# Altium PCB Temp_module2.PcbDoc
Units mm, origin at the board's own origin, x right, y up, seen from the top; angles counter-clockwise.
Board outline 266.06 x 102.49 mm, 2 copper layers (Top Layer, Bottom Layer); 102 components, 47 nets, 448 pads, 151 vias.
Unrouted connection lines stored in the file: 10.
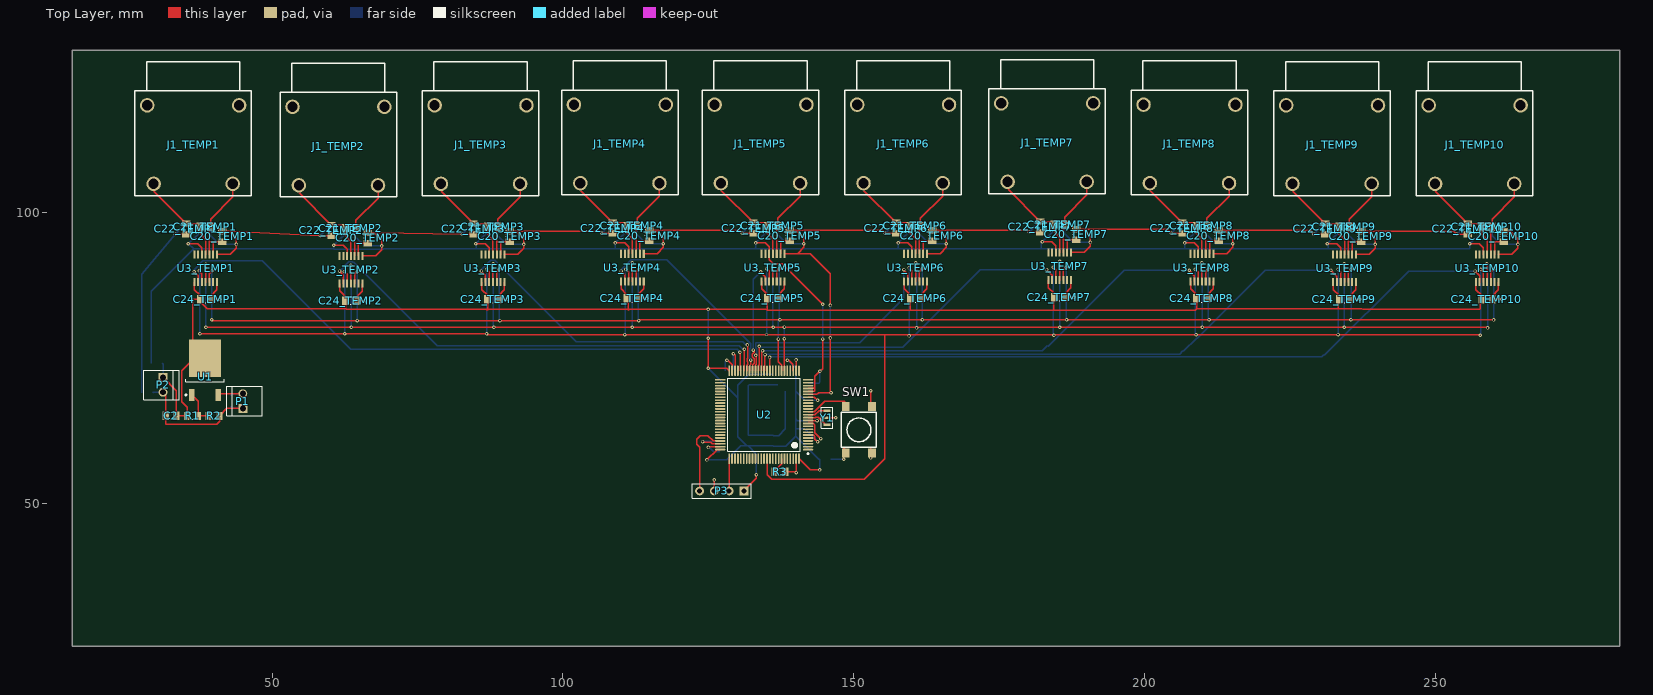
[diagram p0: Top Layer view]
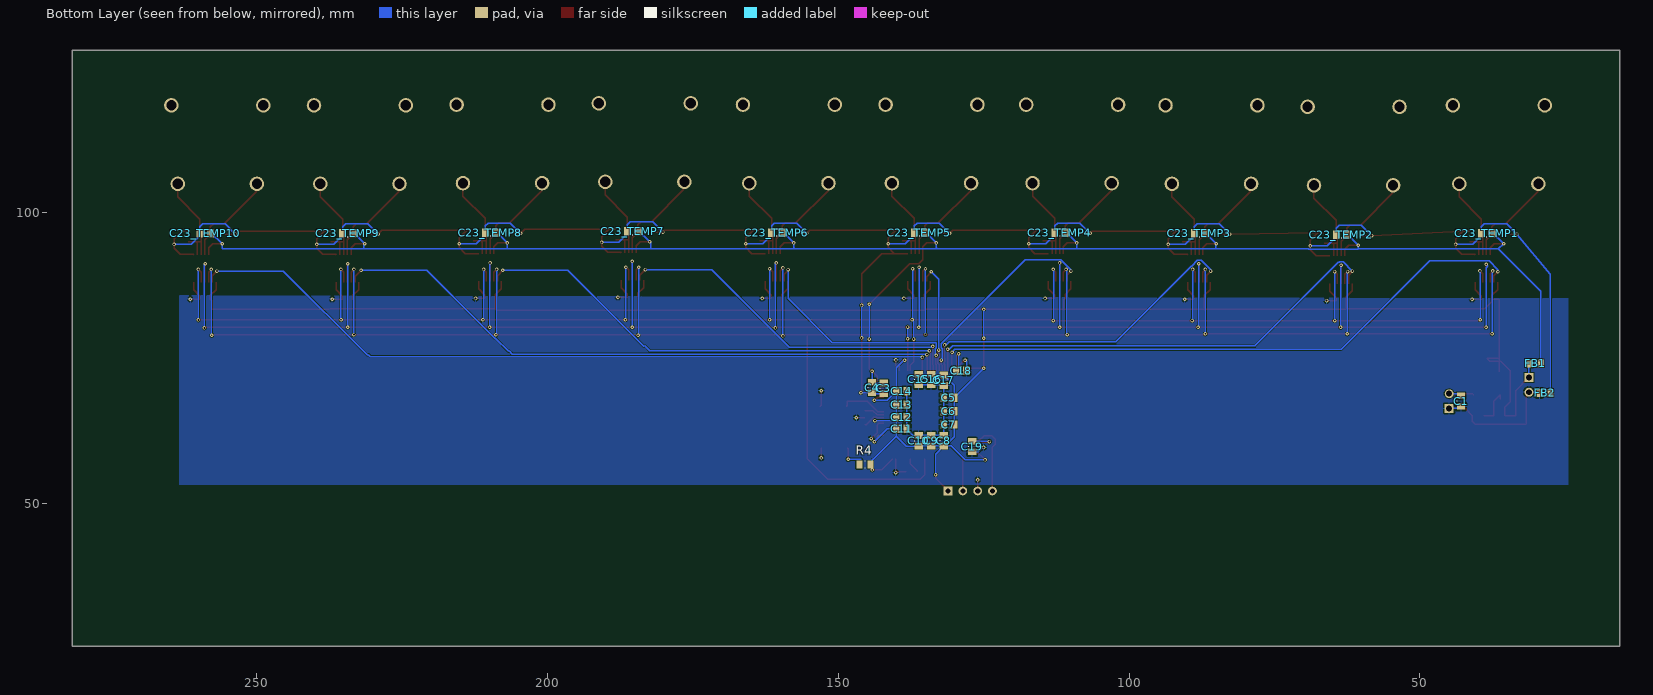
[diagram p1: Bottom Layer view, seen from below]
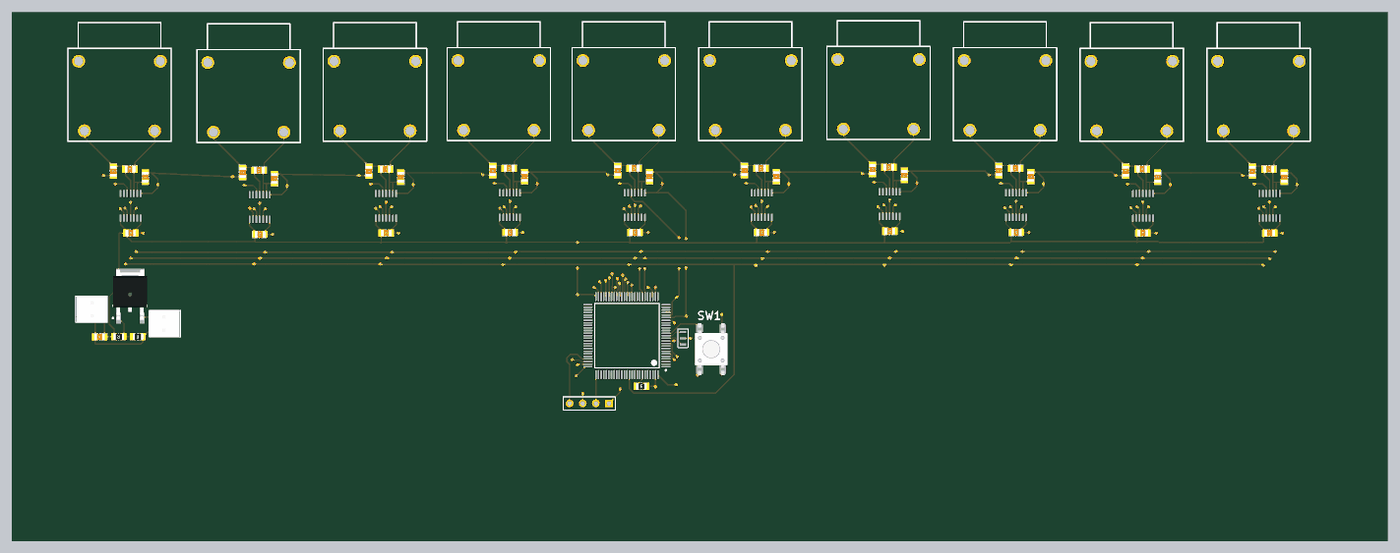
[diagram p2: 3D render of the assembled board from above, using the file's embedded part models]
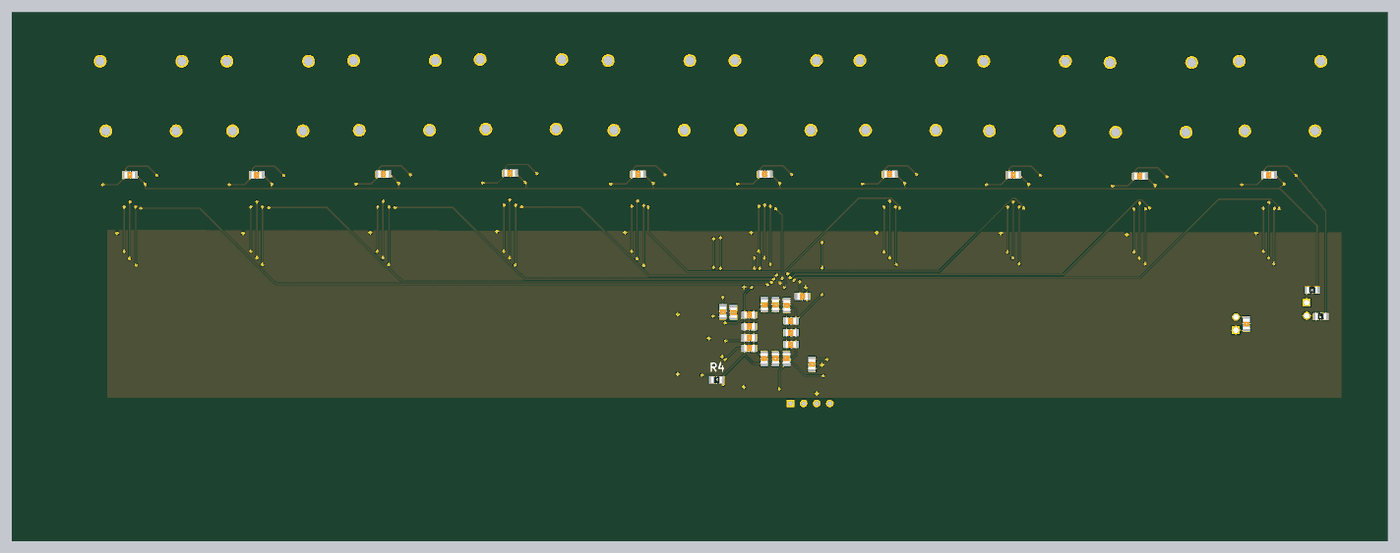
[diagram p3: 3D render of the assembled board from below, using the file's embedded part models]

## Layer stack, top to bottom
Top Solder: solder mask 0.0102, Solder Resist, Dk 3.5
Top Layer: signal copper 0.0356
Dielectric 1: dielectric 0.32, FR-4, Dk 4.8
Bottom Layer: signal copper 0.0356
Bottom Solder: solder mask 0.0102, Solder Resist, Dk 3.5

## Board outline
15.621,25.4 281.686,25.4 281.686,127.889 15.621,127.889

## Design rules (kind name [scope] priority, off if disabled: settings)
Clearance [All] p1: gap=0.152 ignorepadtopadclearanceinfootprint=FALSE
PolygonConnect [All] p1: connectstyle=Relief reliefconductorwidth=0.254 reliefentries=4 polygonreliefangle="90 Angle" airgapwidth=0.254
RoomDefinition TEMP10 [InComponentClass('TEMP10')] p1: confinementstyle=ConfineIn formatcopy=TRUE lockcomponents=FALSE outline 246.126,126.619 246.126,83.312 270.091,83.312 270.091,126.619
RoomDefinition TEMP9 [InComponentClass('TEMP9')] p2: confinementstyle=ConfineIn formatcopy=TRUE lockcomponents=FALSE outline 221.615,126.619 221.615,83.312 245.58,83.312 245.58,126.619
RoomDefinition TEMP8 [InComponentClass('TEMP8')] p3: confinementstyle=ConfineIn formatcopy=TRUE lockcomponents=FALSE outline 197.104,126.746 197.104,83.439 221.069,83.439 221.069,126.746
RoomDefinition TEMP7 [InComponentClass('TEMP7')] p4: confinementstyle=ConfineIn formatcopy=TRUE lockcomponents=FALSE outline 172.636,126.962 172.636,83.655 196.601,83.655 196.601,126.962
RoomDefinition TEMP6 [InComponentClass('TEMP6')] p5: confinementstyle=ConfineIn formatcopy=TRUE lockcomponents=FALSE outline 147.866,126.746 147.866,83.439 171.831,83.439 171.831,126.746
RoomDefinition TEMP5 [InComponentClass('TEMP5')] p6: confinementstyle=ConfineIn formatcopy=TRUE lockcomponents=FALSE outline 123.355,126.746 123.355,83.439 147.32,83.439 147.32,126.746
RoomDefinition TEMP4 [InComponentClass('TEMP4')] p7: confinementstyle=ConfineIn formatcopy=TRUE lockcomponents=FALSE outline 99.187,126.746 99.187,83.439 123.152,83.439 123.152,126.746
RoomDefinition TEMP3 [InComponentClass('TEMP3')] p8: confinementstyle=ConfineIn formatcopy=TRUE lockcomponents=FALSE outline 75.222,126.619 75.222,83.312 99.187,83.312 99.187,126.619
RoomDefinition TEMP2 [InComponentClass('TEMP2')] p9: confinementstyle=ConfineIn formatcopy=TRUE lockcomponents=FALSE outline 50.8,126.365 50.8,83.058 74.765,83.058 74.765,126.365
RoomDefinition TEMP1 [InComponentClass('TEMP1')] p10: confinementstyle=ConfineIn formatcopy=TRUE lockcomponents=FALSE outline 25.819,126.619 25.819,83.312 49.784,83.312 49.784,126.619
RoomDefinition POWER [InComponentClass('POWER')] p11: confinementstyle=ConfineIn formatcopy=TRUE lockcomponents=FALSE outline 26.289,61.849 48.768,61.849 48.768,80.518 26.289,80.518
RoomDefinition micro_schematic [InComponentClass('micro_schematic')] p12: confinementstyle=ConfineIn formatcopy=TRUE lockcomponents=FALSE outline 157.516,50.455 157.516,78.522 119.924,78.522 119.924,50.455
RoutingVias [All] p1: holewidth=0.3 width=0.6 viastyle="Through Hole" minholewidth=0.3 minwidth=0.6 maxholewidth=0.3 maxwidth=0.6
SolderMaskExpansion [All] p1: expansion=0.102
Width [All] p1: maxlimit=2.54 minlimit=0.152 preferedwidth=0.254
30 further rules are at their usual default settings.

## Classes and differential pairs
channel class Temp_converter: TEMP1 TEMP2 TEMP3 TEMP4 TEMP5 TEMP6 TEMP7 TEMP8 TEMP9 TEMP10
component class TEMP10: C20_TEMP10 C21_TEMP10 C22_TEMP10 C23_TEMP10 C24_TEMP10 J1_TEMP10 U3_TEMP10
component class TEMP9: C20_TEMP9 C21_TEMP9 C22_TEMP9 C23_TEMP9 C24_TEMP9 J1_TEMP9 U3_TEMP9
component class TEMP8: C20_TEMP8 C21_TEMP8 C22_TEMP8 C23_TEMP8 C24_TEMP8 J1_TEMP8 U3_TEMP8
component class TEMP7: C20_TEMP7 C21_TEMP7 C22_TEMP7 C23_TEMP7 C24_TEMP7 J1_TEMP7 U3_TEMP7
component class TEMP6: C20_TEMP6 C21_TEMP6 C22_TEMP6 C23_TEMP6 C24_TEMP6 J1_TEMP6 U3_TEMP6
component class TEMP5: C20_TEMP5 C21_TEMP5 C22_TEMP5 C23_TEMP5 C24_TEMP5 J1_TEMP5 U3_TEMP5
component class TEMP4: C20_TEMP4 C21_TEMP4 C22_TEMP4 C23_TEMP4 C24_TEMP4 J1_TEMP4 U3_TEMP4
component class TEMP3: C20_TEMP3 C21_TEMP3 C22_TEMP3 C23_TEMP3 C24_TEMP3 J1_TEMP3 U3_TEMP3
component class TEMP2: C20_TEMP2 C21_TEMP2 C22_TEMP2 C23_TEMP2 C24_TEMP2 J1_TEMP2 U3_TEMP2
component class TEMP1: C20_TEMP1 C21_TEMP1 C22_TEMP1 C23_TEMP1 C24_TEMP1 J1_TEMP1 U3_TEMP1
component class POWER: C1 C2 FB1 FB2 P1 P2 R1 R2 U1
component class micro_schematic: C3 C4 C5 C6 C7 C8 C9 C10 C11 C12 C13 C14 C15 C16 C17 C18 C19 P3 R3 U2 Y1

## Components (designator, comment, footprint, x,y, rotation, side; value= is the part's Value field where it differs from the comment)
C1 ".1uF" C0805 42.926,67.553 r270 bottom
C2 "1uF" C0805 32.628,65.024 r180 top
C3 "100n" C0805 142.149,69.759 r270 bottom
C4 "1u" C0805 144.181,69.897 r270 bottom
C5 "100n" C0805 130.973,68.108 r0 bottom
C6 "100n" C0805 130.962,65.822 r0 bottom
C7 "100n" C0805 130.962,63.536 r0 bottom
C8 "100n" C0805 131.851,60.753 r90 bottom
C9 "4u7" C0805 134.01,60.753 r90 bottom
C10 "100n" C0805 136.169,60.731 r90 bottom
C11 "100n" C0805 139.101,62.774 r180 bottom
C12 "100n" C0805 139.101,64.806 r180 bottom
C13 "100n" C0805 139.101,66.965 r180 bottom
C14 "100n" C0805 139.101,69.251 r180 bottom
C15 "100n" C0805 136.169,71.283 r270 bottom
C16 "100n" C0805 134.01,71.283 r270 bottom
C17 "100n" C0805 131.851,71.156 r270 bottom
C18 "2u2" C0805 128.825,72.807 r180 bottom
C19 "2u2" C0805 126.954,59.748 r270 bottom
C20_TEMP1 "0.01uF" C0805 41.44,95.874 r90 top (schematic designator C20)
C20_TEMP2 "0.01uF" C0805 66.421,95.62 r90 top (schematic designator C20)
C20_TEMP3 "0.01uF" C0805 90.843,95.874 r90 top (schematic designator C20)
C20_TEMP4 "0.01uF" C0805 114.808,96.001 r90 top (schematic designator C20)
C20_TEMP5 "0.01uF" C0805 138.976,96.001 r90 top (schematic designator C20)
C20_TEMP6 "0.01uF" C0805 163.487,96.001 r90 top (schematic designator C20)
C20_TEMP7 "0.01uF" C0805 188.257,96.217 r90 top (schematic designator C20)
C20_TEMP8 "0.01uF" C0805 212.725,96.001 r90 top (schematic designator C20)
C20_TEMP9 "0.01uF" C0805 237.236,95.874 r90 top (schematic designator C20)
C20_TEMP10 "0.01uF" C0805 261.747,95.874 r90 top (schematic designator C20)
C21_TEMP1 "0.1uF" C0805 38.508,97.536 r180 top (schematic designator C21)
C21_TEMP2 "0.1uF" C0805 63.489,97.282 r180 top (schematic designator C21)
C21_TEMP3 "0.1uF" C0805 87.911,97.536 r180 top (schematic designator C21)
C21_TEMP4 "0.1uF" C0805 111.876,97.663 r180 top (schematic designator C21)
C21_TEMP5 "0.1uF" C0805 136.044,97.663 r180 top (schematic designator C21)
C21_TEMP6 "0.1uF" C0805 160.555,97.663 r180 top (schematic designator C21)
C21_TEMP7 "0.1uF" C0805 185.325,97.879 r180 top (schematic designator C21)
C21_TEMP8 "0.1uF" C0805 209.793,97.663 r180 top (schematic designator C21)
C21_TEMP9 "0.1uF" C0805 234.304,97.536 r180 top (schematic designator C21)
C21_TEMP10 "0.1uF" C0805 258.815,97.536 r180 top (schematic designator C21)
C22_TEMP1 "0.01uF" C0805 35.217,97.166 r270 top (schematic designator C22)
C22_TEMP2 "0.01uF" C0805 60.198,96.912 r270 top (schematic designator C22)
C22_TEMP3 "0.01uF" C0805 84.62,97.166 r270 top (schematic designator C22)
C22_TEMP4 "0.01uF" C0805 108.585,97.293 r270 top (schematic designator C22)
C22_TEMP5 "0.01uF" C0805 132.753,97.293 r270 top (schematic designator C22)
C22_TEMP6 "0.01uF" C0805 157.264,97.293 r270 top (schematic designator C22)
C22_TEMP7 "0.01uF" C0805 182.034,97.509 r270 top (schematic designator C22)
C22_TEMP8 "0.01uF" C0805 206.502,97.293 r270 top (schematic designator C22)
C22_TEMP9 "0.01uF" C0805 231.013,97.166 r270 top (schematic designator C22)
C22_TEMP10 "0.01uF" C0805 255.524,97.166 r270 top (schematic designator C22)
C23_TEMP1 "0.1uF" C0805 38.508,96.393 r0 bottom (schematic designator C23)
C23_TEMP2 "0.1uF" C0805 63.489,96.139 r0 bottom (schematic designator C23)
C23_TEMP3 "0.1uF" C0805 87.911,96.393 r0 bottom (schematic designator C23)
C23_TEMP4 "0.1uF" C0805 111.876,96.52 r0 bottom (schematic designator C23)
C23_TEMP5 "0.1uF" C0805 136.044,96.52 r0 bottom (schematic designator C23)
C23_TEMP6 "0.1uF" C0805 160.555,96.52 r0 bottom (schematic designator C23)
C23_TEMP7 "0.1uF" C0805 185.325,96.736 r0 bottom (schematic designator C23)
C23_TEMP8 "0.1uF" C0805 209.793,96.52 r0 bottom (schematic designator C23)
C23_TEMP9 "0.1uF" C0805 234.304,96.393 r0 bottom (schematic designator C23)
C23_TEMP10 "0.1uF" C0805 258.815,96.393 r0 bottom (schematic designator C23)
C24_TEMP1 "0.1uF" C0805 38.53,85.09 r0 top (schematic designator C24)
C24_TEMP2 "0.1uF" C0805 63.511,84.836 r0 top (schematic designator C24)
C24_TEMP3 "0.1uF" C0805 87.933,85.09 r0 top (schematic designator C24)
C24_TEMP4 "0.1uF" C0805 111.898,85.217 r0 top (schematic designator C24)
C24_TEMP5 "0.1uF" C0805 136.066,85.217 r0 top (schematic designator C24)
C24_TEMP6 "0.1uF" C0805 160.577,85.217 r0 top (schematic designator C24)
C24_TEMP7 "0.1uF" C0805 185.347,85.433 r0 top (schematic designator C24)
C24_TEMP8 "0.1uF" C0805 209.815,85.217 r0 top (schematic designator C24)
C24_TEMP9 "0.1uF" C0805 234.326,85.09 r0 top (schematic designator C24)
C24_TEMP10 "0.1uF" C0805 258.837,85.09 r0 top (schematic designator C24)
FB1 "FERRITE" R0805 30.16,74.041 r0 bottom
FB2 "FERRITE" R0805 28.514,68.961 r0 bottom
J1_TEMP1 "PCC-SMP" PCC-SMP 36.418,104.902 r0 top (schematic designator J1)
J1_TEMP2 "PCC-SMP" PCC-SMP 61.399,104.648 r0 top (schematic designator J1)
J1_TEMP3 "PCC-SMP" PCC-SMP 85.821,104.902 r0 top (schematic designator J1)
J1_TEMP4 "PCC-SMP" PCC-SMP 109.786,105.029 r0 top (schematic designator J1)
J1_TEMP5 "PCC-SMP" PCC-SMP 133.954,105.029 r0 top (schematic designator J1)
J1_TEMP6 "PCC-SMP" PCC-SMP 158.465,105.029 r0 top (schematic designator J1)
J1_TEMP7 "PCC-SMP" PCC-SMP 183.235,105.245 r0 top (schematic designator J1)
J1_TEMP8 "PCC-SMP" PCC-SMP 207.703,105.029 r0 top (schematic designator J1)
J1_TEMP9 "PCC-SMP" PCC-SMP 232.214,104.902 r0 top (schematic designator J1)
J1_TEMP10 "PCC-SMP" PCC-SMP 256.725,104.902 r0 top (schematic designator J1)
P1 "Molex KK 1x2" "Molex KK 2x1" 44.958,67.564 r180 top
P2 "Molex KK 1x2" "Molex KK 2x1" 31.242,70.358 r0 top
P3 "Header 4" HDR1X4 131.1,52.106 r180 top
R1 "240R" R0805 36.322,65.024 r180 top
R2 "390 R" R0805 40.005,65.024 r180 top
R3 "100R" R0805 137.323,55.408 r0 top
R4 "1K" R0805 145.415,56.642 r180 bottom
SW1 "Push Switch" PUSHBUTTON 150.876,62.611 r90 top
U1 "LM317" D-PAK 38.481,72.88 r90 top
U2 "MC-ARM-STM32F446-LQFP100" STM-LQFP100_N 134.575,65.219 r180 top
U3_TEMP1 "MAXIM TSSOP14" "MAXIM TSSOP14" 40.514,90.386 r270 top (schematic designator U3)
U3_TEMP2 "MAXIM TSSOP14" "MAXIM TSSOP14" 65.495,90.132 r270 top (schematic designator U3)
U3_TEMP3 "MAXIM TSSOP14" "MAXIM TSSOP14" 89.917,90.386 r270 top (schematic designator U3)
U3_TEMP4 "MAXIM TSSOP14" "MAXIM TSSOP14" 113.882,90.513 r270 top (schematic designator U3)
U3_TEMP5 "MAXIM TSSOP14" "MAXIM TSSOP14" 138.05,90.513 r270 top (schematic designator U3)
U3_TEMP6 "MAXIM TSSOP14" "MAXIM TSSOP14" 162.561,90.513 r270 top (schematic designator U3)
U3_TEMP7 "MAXIM TSSOP14" "MAXIM TSSOP14" 187.331,90.729 r270 top (schematic designator U3)
U3_TEMP8 "MAXIM TSSOP14" "MAXIM TSSOP14" 211.799,90.513 r270 top (schematic designator U3)
U3_TEMP9 "MAXIM TSSOP14" "MAXIM TSSOP14" 236.31,90.386 r270 top (schematic designator U3)
U3_TEMP10 "MAXIM TSSOP14" "MAXIM TSSOP14" 260.821,90.386 r270 top (schematic designator U3)
Y1 "CSTCE8M00" "8MHz Ceramic Resonator" 145.415,65.913 r270 top

## Footprints (in the part's own frame and the unit in brackets; to place one, negate y for a bottom-side part, rotate by r counter-clockwise, add the part's x,y. Pads: shape width x height; smd on the part's side, far side on the other; paste and mask are expansions set on the pad)
"8MHz Ceramic Resonator" [mm] "8MHz Ceramic Resonator Murata"
  rect 0.4x1.2 smd: 1(0,0) 2(1.2,0) 3(2.4,0)
  silkscreen extent -0.6,-1 3,1
C0805 [mm] "Chip Capacitor, Body 2.0x1.2mm, Height 0.75mm, IPC Medium Density"
  rect 1.15x1.45 smd: 1(-0.9,0) 2(0.9,0)
  silkscreen extent -0.05,-0.62 0.05,0.63, body extent -1.42,-0.67 1.58,0.73, height 0.93
D-PAK [mm] "D-PAK, 4-Leads, Body 6.1x6.5mm, Pitch 2.28mm, Lead Span 9.7mm, IPC Medium Density"
  rect 2.1x0.95 smd: 1(-4.25,2.28) 3(-4.25,-2.28)
  rect 6.5x5.5 smd: 4(2.05,0)
  silkscreen extent -4.37,-3.3 -1.6,3.43, body extent -4.6,-3.28 5.1,3.3, height 2.3
HDR1X4 [mm] "Connector; Header; 4 Position"
  rect 1.5x1.5 hole 0.9: 1(0,0)
  round 1.5 hole 0.9: 2(2.54,0) 3(5.08,0) 4(7.62,0)
  silkscreen extent -1.27,-1.27 8.89,1.27
"MAXIM TSSOP14" [mm]
  rect 1.4x0.35 smd: 1(-2.375,0) 2(-2.375,-0.65) 3(-2.375,-1.3) 4(-2.375,-1.95) 5(-2.375,-2.6) 6(-2.375,-3.25) 7(-2.375,-3.9) 8(2.375,-3.9) 9(2.375,-3.25) 10(2.375,-2.6) 11(2.375,-1.95) 12(2.375,-1.3) 13(2.375,-0.65) 14(2.375,0)
"Molex KK 2x1" [mil]
  rect 60x60 hole 40: 1(0,50)
  round 60 hole 40: 2(0,-50)
  silkscreen extent -130,-100 110,100, body extent -120,-100 110,100, height 458
PCC-SMP [mm]
  round 2.5 hole 1.77: +(-6.8,0) G(-7.9,13.5) G(7.9,13.5) K(6.8,0)
  silkscreen extent -10,-2 10,21
PUSHBUTTON [mm]
  rect 1.55x1.3 smd: 1(-4,2.25) 1(4,2.25) 2(-4,-2.25) 2(4,-2.25)
  silkscreen extent -3,-3 3,3, body extent -5,-3 5,3, height 5.12
R0805 [mm] "Chip Resistor, Body 2.0x1.3mm, IPC Medium Density"
  rect 1.05x1.4 smd: 1(-0.95,0) 2(0.95,0)
  silkscreen extent -0.05,-0.6 0.05,0.6, body extent -1.46,-0.7 1.54,0.7, height 0.53
STM-LQFP100_N [mm] "Thin QFP, 100-Leads, Body 14x14mm, Pitch 0.5mm, IPC Medium Density"
  oval 1.8x0.3 smd: 1(-7.55,6) 2(-7.55,5.5) 3(-7.55,5) 4(-7.55,4.5) 5(-7.55,4) 6(-7.55,3.5) 7(-7.55,3) 8(-7.55,2.5) 9(-7.55,2) 10(-7.55,1.5) 11(-7.55,1) 12(-7.55,0.5) 13(-7.55,0) 14(-7.55,-0.5) 15(-7.55,-1) 16(-7.55,-1.5) 17(-7.55,-2) 18(-7.55,-2.5) 19(-7.55,-3) 20(-7.55,-3.5) 21(-7.55,-4) 22(-7.55,-4.5) 23(-7.55,-5) 24(-7.55,-5.5) 25(-7.55,-6) 51(7.55,-6) 52(7.55,-5.5) 53(7.55,-5) 54(7.55,-4.5) 55(7.55,-4) 56(7.55,-3.5) 57(7.55,-3) 58(7.55,-2.5) 59(7.55,-2) 60(7.55,-1.5) 61(7.55,-1) 62(7.55,-0.5) 63(7.55,0) 64(7.55,0.5) 65(7.55,1) 66(7.55,1.5) 67(7.55,2) 68(7.55,2.5) 69(7.55,3) 70(7.55,3.5) 71(7.55,4) 72(7.55,4.5) 73(7.55,5) 74(7.55,5.5) 75(7.55,6)
  oval 0.3x1.8 smd: 26(-6,-7.55) 27(-5.5,-7.55) 28(-5,-7.55) 29(-4.5,-7.55) 30(-4,-7.55) 31(-3.5,-7.55) 32(-3,-7.55) 33(-2.5,-7.55) 34(-2,-7.55) 35(-1.5,-7.55) 36(-1,-7.55) 37(-0.5,-7.55) 38(0,-7.55) 39(0.5,-7.55) 40(1,-7.55) 41(1.5,-7.55) 42(2,-7.55) 43(2.5,-7.55) 44(3,-7.55) 45(3.5,-7.55) 46(4,-7.55) 47(4.5,-7.55) 48(5,-7.55) 49(5.5,-7.55) 50(6,-7.55) 76(6,7.55) 77(5.5,7.55) 78(5,7.55) 79(4.5,7.55) 80(4,7.55) 81(3.5,7.55) 82(3,7.55) 83(2.5,7.55) 84(2,7.55) 85(1.5,7.55) 86(1,7.55) 87(0.5,7.55) 88(0,7.55) 89(-0.5,7.55) 90(-1,7.55) 91(-1.5,7.55) 92(-2,7.55) 93(-2.5,7.55) 94(-3,7.55) 95(-3.5,7.55) 96(-4,7.55) 97(-4.5,7.55) 98(-5,7.55) 99(-5.5,7.55) 100(-6,7.55)
  silkscreen extent -7.68,-6.25 6.25,6.82, body extent -7,-7 7,7, height 1.6

## Part data
C1 C2 C3 C4 C5 C6 C7 C8 C9 C10 C11 C12 C13 C14 C15 C16 C17 C18 C19 C20_TEMP1 C20_TEMP2 C20_TEMP3 C20_TEMP4 C20_TEMP5 C20_TEMP6 C20_TEMP7 C20_TEMP8 C20_TEMP9 C20_TEMP10 C21_TEMP1 C21_TEMP2 C21_TEMP3 C21_TEMP4 C21_TEMP5 C21_TEMP6 C21_TEMP7 C21_TEMP8 C21_TEMP9 C21_TEMP10 C22_TEMP1 C22_TEMP2 C22_TEMP3 C22_TEMP4 C22_TEMP5 C22_TEMP6 C22_TEMP7 C22_TEMP8 C22_TEMP9 C22_TEMP10 C23_TEMP1 C23_TEMP2 C23_TEMP3 C23_TEMP4 C23_TEMP5 C23_TEMP6 C23_TEMP7 C23_TEMP8 C23_TEMP9 C23_TEMP10 C24_TEMP1 C24_TEMP2 C24_TEMP3 C24_TEMP4 C24_TEMP5 C24_TEMP6 C24_TEMP7 C24_TEMP8 C24_TEMP9 C24_TEMP10: library part C0805, "0805 Capacitor"
FB1 FB2: "FERRITE BEAD 0805"
J1_TEMP1 J1_TEMP2 J1_TEMP3 J1_TEMP4 J1_TEMP5 J1_TEMP6 J1_TEMP7 J1_TEMP8 J1_TEMP9 J1_TEMP10: "THERMOCOUPLE CONNECTOR"
P1 P2: "1x2 Molex KK Connector"
P3: "Header, 4-Pin", LatestRevisionDate=17-Jul-2002, LatestRevisionNote="Re-released for DXP Platform.", Publisher="Altium Limited"
R1 R2 R3 R4: library part R0805, "RESISTOR 0805"
SW1: library part PUSHBUTTON
U1: "Linear Voltage Regulator"
Y1: "8MHz Ceramic Resonator"

## Via types
v1: diameter 0.6, hole 0.3, Top Layer to Bottom Layer, 151 vias

## Nets (pads, with @x,y where several pads share a name; then routed paths per layer and width w, separated by ;. In a path a pad name is that pad's centre, name@x,y a point inside that pad or via, vN(x,y) a via of type N, cw(c..) or ccw(c..) an arc to the next point about the centre after c; other vN are vias at no path point)
3V3_AVDD: C3.1 C4.1 C23_TEMP1.1 C23_TEMP2.1 C23_TEMP3.1 C23_TEMP4.1 C23_TEMP5.1 C23_TEMP6.1 C23_TEMP7.1 C23_TEMP8.1 C23_TEMP9.1 C23_TEMP10.1 FB1.1 U2.21 U2.22 U3_TEMP1.5 U3_TEMP2.5 U3_TEMP3.5 U3_TEMP4.5 U3_TEMP5.5 U3_TEMP6.5 U3_TEMP7.5 U3_TEMP8.5 U3_TEMP9.5 U3_TEMP10.5 | length 358.6
  Top Layer w0.254: v1@35.344,94.615 v1(35.598,94.615) 37.249,94.615 37.914,93.95 U3_TEMP1.5 ; v1@60.325,94.361 v1(60.579,94.361) 62.23,94.361 62.895,93.696 U3_TEMP2.5 ; v1@84.747,94.615 v1(85.001,94.615) 86.652,94.615 87.317,93.95 U3_TEMP3.5 ; v1@108.712,94.742 v1(108.966,94.742) 110.617,94.742 111.282,94.077 U3_TEMP4.5 ; v1(133.134,94.742) 134.785,94.742 135.45,94.077 U3_TEMP5.5 135.45,91.88 136.144,91.186 137.668,91.186 v1(144.653,84.201) ; U2.21 143.26,69.219 143.304,69.263 143.304,70.041 ; U2.22 142.125,69.79 143.053,69.79 143.304,70.041 ; v1(144.653,78.232) 144.653,73.152 v1(144.181,72.68) 143.304,71.803 143.304,70.041 ; v1@157.391,94.742 v1(157.645,94.742) 159.296,94.742 159.961,94.077 U3_TEMP6.5 ; v1@182.161,94.958 v1(182.415,94.958) 184.066,94.958 184.731,94.293 U3_TEMP7.5 ; v1@206.629,94.742 v1(206.883,94.742) 208.534,94.742 209.199,94.077 U3_TEMP8.5 ; v1@231.14,94.615 v1(231.394,94.615) 233.045,94.615 233.71,93.95 U3_TEMP9.5 ; v1@255.651,94.615 v1(255.905,94.615) 257.556,94.615 258.221,93.95 U3_TEMP10.5
  Bottom Layer w0.254: FB1.1 29.21,86.449 36.487,93.726 ; C23_TEMP1.1 37.608,96.625 v1(35.598,94.615) 36.487,93.726 ; C23_TEMP2.1 62.589,96.371 v1(60.579,94.361) 60.579,93.726 ; C23_TEMP3.1 87.011,96.625 v1(85.001,94.615) 85.09,94.526 85.09,93.726 ; C23_TEMP4.1 110.976,96.752 v1(108.966,94.742) 108.966,93.853 108.839,93.726 ; C23_TEMP5.1 135.144,96.752 v1(133.134,94.742) 133.134,93.891 132.969,93.726 ; C3.1 144.043,70.659 C4.1 v1(144.181,72.68) ; v1(144.653,78.232) v1(144.653,84.201) ; C23_TEMP6.1 159.655,96.752 v1(157.645,94.742) 157.645,93.891 157.48,93.726 ; C23_TEMP7.1 184.425,96.968 v1(182.415,94.958) 182.245,94.788 182.245,93.726 ; C23_TEMP8.1 208.893,96.752 v1(206.883,94.742) 206.883,93.726 ; C23_TEMP9.1 233.404,96.625 v1(231.394,94.615) 231.521,94.488 231.521,93.726 ; C23_TEMP10.1 257.915,96.625 v1(255.905,94.615) 255.905,93.853 255.778,93.726 231.521,93.726 ; 36.487,93.726 60.579,93.726 ; 60.579,93.726 60.65,93.655 69.074,93.655 69.145,93.726 85.09,93.726 ; 85.09,93.726 108.839,93.726 ; 108.839,93.726 132.969,93.726 ; 132.969,93.726 157.48,93.726 ; 157.48,93.726 182.245,93.726 ; 182.245,93.726 206.883,93.726 ; 206.883,93.726 231.521,93.726
3V3_DVDD: C2.1 C5.1 C6.1 C7.1 C8.1 C9.1 C10.1 C11.1 C12.1 C13.1 C14.1 C15.1 C16.1 C17.1 C24_TEMP1.1 C24_TEMP2.1 C24_TEMP3.1 C24_TEMP4.1 C24_TEMP5.1 C24_TEMP6.1 C24_TEMP7.1 C24_TEMP8.1 C24_TEMP9.1 C24_TEMP10.1 FB1.2 P2.1 P3.1 R1.2 R4.2 U1.4 U2.6 U2.11 U2.19 U2.28 U2.50 U2.75 U2.100 U3_TEMP1.8 U3_TEMP2.8 U3_TEMP3.8 U3_TEMP4.8 U3_TEMP5.8 U3_TEMP6.8 U3_TEMP7.8 U3_TEMP8.8 U3_TEMP9.8 U3_TEMP10.8 | length 428
  Top Layer w0.254: P2.1 33.528,69.342 C2.1 R1.2 35.372,66.482 34.417,67.437 34.417,72.771 36.068,74.422 U1.4@36.322,74.422 ; U1.4@36.322,72.644 U1.4@36.322,74.422 ; U1.4@36.449,74.93 U1.4 37.973,74.422 U1.4@36.322,74.422 ; U3_TEMP1.8 36.614,86.741 37.63,85.725 C24_TEMP1.1 ; U3_TEMP2.8 61.595,86.487 62.611,85.471 C24_TEMP2.1 62.611,83.439 ; U3_TEMP3.8 86.017,86.741 87.033,85.725 C24_TEMP3.1 87.033,83.223 ; U3_TEMP4.8 109.982,86.868 110.998,85.852 C24_TEMP4.1 111.252,84.963 111.252,83.185 ; v1(124.75,57.44) 126.529,59.219 U2.75 ; v1(124.993,78.359) v1(124.993,73.188) 128.156,73.188 U2.50 ; P3.1 133.259,54.265 v1(133.259,54.9) ; U3_TEMP5.8 134.15,86.868 135.166,85.852 C24_TEMP5.1 135.128,85.179 135.128,83.185 ; v1(138.593,74.585) 138.841,74.585 139.504,73.922 139.504,72.84 U2.28 ; U2.100 142.516,55.728 v1(144.12,55.728) ; U2.6 142.196,61.648 143.208,61.648 143.304,61.552 143.304,61.039 v1(143.764,60.579) ; U2.11 v1(143.68,64.219) ; U2.19 143.236,68.219 v1(143.764,67.691) ; U3_TEMP6.8 158.661,86.868 159.677,85.852 C24_TEMP6.1 159.677,83.185 ; U3_TEMP7.8 183.431,87.084 184.447,86.068 184.447,85.598 184.404,85.555 184.404,83.185 ; U3_TEMP8.8 207.899,86.868 208.915,85.852 C24_TEMP8.1 208.915,83.439 ; U3_TEMP9.8 232.41,86.741 233.426,85.725 C24_TEMP9.1 233.299,84.963 233.299,83.312 ; U3_TEMP10.8 256.921,86.741 257.937,85.725 C24_TEMP10.1 257.683,84.836 257.683,83.312 237.513,83.312 237.361,83.464 233.451,83.464 233.299,83.312 ; U1.4@36.322,74.422 36.322,85.09 C24_TEMP1.1 ; C24_TEMP1.1 37.63,84.671 38.862,83.439 62.611,83.439 ; 62.611,83.439 62.713,83.337 86.843,83.337 86.995,83.185 87.033,83.223 ; 87.033,83.223 87.147,83.337 111.1,83.337 111.252,83.185 ; 111.252,83.185 111.404,83.337 134.976,83.337 135.128,83.185 ; 135.128,83.185 159.677,83.185 ; 159.677,83.185 184.404,83.185 ; 184.404,83.185 208.661,83.185 208.915,83.439 ; 208.915,83.439 208.94,83.464 233.147,83.464 233.299,83.312
  Bottom Layer w0.254: FB1.2 31.242,73.909 P2.1 ; v1(124.75,57.44) 128.179,57.44 130.592,59.853 C8.1@131.597,59.853 ; v1(124.993,73.188) C5.1 ; v1(124.993,78.359) v1(124.993,83.312) ; v1(133.259,54.9) 133.259,58.445 C8.1 ; C15.1 C16.1 131.978,72.183 C17.1 130.073,70.278 C5.1 ; v1(138.593,74.585) 138.72,74.585 140.001,73.304 C14.1 ; v1(143.68,64.219) 140.298,64.219 C12.1@140.001,64.516 ; v1(143.764,60.579) 141.569,62.774 C11.1 ; v1(143.764,67.691) 141.561,67.691 C14.1 ; v1(144.12,55.728) 144.12,57.567 143.96,57.567 140.001,61.526 ; C5.1 130.073,65.833 C6.1 C7.1 130.062,61.388 C8.1@131.597,59.853 ; C8.1@131.597,59.853 C8.1 ; C8.1 C9.1 136.147,59.853 C10.1 138.306,59.831 140.001,61.526 ; 140.001,61.526 C11.1 ; C11.1 C12.1@140.001,64.516 ; C12.1@140.001,64.516 C12.1 C13.1 C14.1
AGND: C3.2 C4.2 C20_TEMP1.2 C20_TEMP2.2 C20_TEMP3.2 C20_TEMP4.2 C20_TEMP5.2 C20_TEMP6.2 C20_TEMP7.2 C20_TEMP8.2 C20_TEMP9.2 C20_TEMP10.2 C22_TEMP1.2 C22_TEMP2.2 C22_TEMP3.2 C22_TEMP4.2 C22_TEMP5.2 C22_TEMP6.2 C22_TEMP7.2 C22_TEMP8.2 C22_TEMP9.2 C22_TEMP10.2 C23_TEMP1.2 C23_TEMP2.2 C23_TEMP3.2 C23_TEMP4.2 C23_TEMP5.2 C23_TEMP6.2 C23_TEMP7.2 C23_TEMP8.2 C23_TEMP9.2 C23_TEMP10.2 FB2.1 U2.20 U3_TEMP1.1 U3_TEMP2.1 U3_TEMP3.1 U3_TEMP4.1 U3_TEMP5.1 U3_TEMP6.1 U3_TEMP7.1 U3_TEMP8.1 U3_TEMP9.1 U3_TEMP10.1 | length 442.6
  Top Layer w0.254: v1(33.312,96.266) C22_TEMP1.2 ; U3_TEMP1.1 40.551,92.798 42.798,92.798 43.853,93.853 v1(43.853,94.488) 43.853,95.504 42.637,96.72 ; C20_TEMP1.2 42.583,96.774 42.637,96.72 ; C22_TEMP2.2 v1(58.293,96.012) 42.637,96.72 ; U3_TEMP2.1 65.532,92.544 67.779,92.544 68.834,93.599 v1(68.834,94.234) 68.834,95.25 67.582,96.502 ; C20_TEMP2.2 67.582,96.502 ; C22_TEMP3.2 v1(82.715,96.266) 67.582,96.502 ; U3_TEMP3.1 89.954,92.798 92.201,92.798 93.256,93.853 v1(93.256,94.488) 93.256,95.504 91.986,96.774 ; C20_TEMP3.2 91.986,96.774 ; C22_TEMP4.2 v1(106.68,96.393) 106.299,96.774 91.986,96.774 ; U3_TEMP4.1 113.919,92.925 116.166,92.925 117.221,93.98 v1(117.221,94.615) 117.221,95.631 115.951,96.901 ; C20_TEMP4.2 115.951,96.901 ; C22_TEMP5.2 v1(130.848,96.393) 130.34,96.901 115.951,96.901 ; U3_TEMP5.1 138.087,92.925 140.334,92.925 ; C20_TEMP5.2 140.119,96.901 ; U2.20 143.649,68.719 143.927,68.997 v1(146.086,68.997) 145.987,69.096 v1(145.987,78.422) ; v1(145.987,84.01) 145.987,89.471 142.533,92.925 140.334,92.925 ; C22_TEMP6.2 v1(155.359,96.393) 154.851,96.901 140.119,96.901 ; U3_TEMP6.1 162.598,92.925 164.845,92.925 165.9,93.98 v1(165.9,94.615) 165.9,95.631 164.63,96.901 ; C20_TEMP6.2 164.63,96.901 ; C22_TEMP7.2 v1(180.129,96.609) 179.837,96.901 164.63,96.901 ; U3_TEMP7.1 187.368,93.141 189.615,93.141 190.67,94.196 v1(190.67,94.831) 190.67,95.847 189.4,97.117 ; C20_TEMP7.2 189.4,97.117 ; C22_TEMP8.2 v1(204.597,96.393) 203.873,97.117 189.4,97.117 ; U3_TEMP8.1 211.836,92.925 214.083,92.925 215.138,93.98 v1(215.138,94.615) 215.138,95.631 213.868,96.901 ; C20_TEMP8.2 213.868,96.901 ; C22_TEMP9.2 v1(229.108,96.266) 228.473,96.901 213.868,96.901 ; U3_TEMP9.1 236.347,92.798 238.594,92.798 239.649,93.853 v1(239.649,94.488) 239.649,95.504 238.379,96.774 ; C20_TEMP9.2 238.379,96.774 ; C22_TEMP10.2 v1(253.619,96.266) 253.111,96.774 238.379,96.774 ; U3_TEMP10.1 260.858,92.798 263.105,92.798 264.16,93.853 v1(264.16,94.488) 264.16,95.504 262.89,96.774 C20_TEMP10.2 ; 140.119,96.901 141.389,95.631 v1(141.389,94.615) 141.389,93.98 140.334,92.925
  Bottom Layer w0.254: FB2.1 27.564,89.408 v1(33.312,96.266) 35.09,98.044 38.9,98.044 39.408,97.536 C23_TEMP1.2 39.408,96.012 40.932,94.488 v1(43.853,94.488) ; v1(58.293,96.012) 60.071,97.79 63.881,97.79 64.389,97.282 C23_TEMP2.2 64.389,95.758 65.913,94.234 v1(68.834,94.234) ; v1(82.715,96.266) 84.493,98.044 88.303,98.044 88.811,97.536 C23_TEMP3.2 88.811,96.012 90.335,94.488 v1(93.256,94.488) ; v1(106.68,96.393) 108.458,98.171 112.268,98.171 112.776,97.663 C23_TEMP4.2 112.776,96.139 114.3,94.615 v1(117.221,94.615) ; v1(130.848,96.393) 132.626,98.171 136.436,98.171 136.944,97.663 C23_TEMP5.2 136.944,96.139 138.468,94.615 v1(141.389,94.615) ; C3.2 144.043,68.859 C4.2 v1(146.086,68.997) ; v1(145.987,78.422) v1(145.987,84.01) ; v1(155.359,96.393) 157.137,98.171 160.947,98.171 161.455,97.663 C23_TEMP6.2 161.455,96.139 162.979,94.615 v1(165.9,94.615) ; v1(180.129,96.609) 181.907,98.387 185.717,98.387 186.225,97.879 C23_TEMP7.2 186.225,96.355 187.749,94.831 v1(190.67,94.831) ; v1(204.597,96.393) 206.375,98.171 210.185,98.171 210.693,97.663 C23_TEMP8.2 210.693,96.139 212.217,94.615 v1(215.138,94.615) ; v1(229.108,96.266) 230.886,98.044 234.696,98.044 235.204,97.536 C23_TEMP9.2 235.204,96.012 236.728,94.488 v1(239.649,94.488) ; v1(253.619,96.266) 255.397,98.044 259.207,98.044 259.715,97.536 C23_TEMP10.2 259.715,96.012 261.239,94.488 v1(264.16,94.488)
CLK: U2.89 U3_TEMP1.10 U3_TEMP2.10 U3_TEMP3.10 U3_TEMP4.10 U3_TEMP5.10 U3_TEMP6.10 U3_TEMP7.10 U3_TEMP8.10 U3_TEMP9.10 U3_TEMP10.10 | length 402.3
  Top Layer w0.254: v1(37.45,89.945) 37.914,89.482 U3_TEMP1.10 ; v1(37.592,79.121) v1(62.484,79.121) v1(86.868,79.121) ; v1(62.431,89.818) 62.895,89.355 U3_TEMP2.10 ; v1(86.853,90.199) 87.317,89.736 U3_TEMP3.10 ; v1@86.995,78.994 v1(110.617,78.994) 110.625,79.002 155.313,79.002 155.321,78.994 ; v1(110.818,90.199) 111.282,89.736 U3_TEMP4.10 ; v1(134.986,90.326) 135.45,89.863 U3_TEMP5.10 ; U2.89 135.075,54.917 135.89,54.102 151.765,54.102 155.321,57.658 155.321,78.994 ; v1(159.497,90.453) 159.961,89.99 U3_TEMP6.10 ; v1(184.267,90.58) 184.731,90.117 U3_TEMP7.10 ; v1(208.735,90.199) 209.199,89.736 U3_TEMP8.10 ; v1(233.246,90.199) 233.71,89.736 U3_TEMP9.10 ; v1@257.683,78.994 v1(233.246,78.994) 155.321,78.994 ; v1(257.757,90.199) 258.221,89.736 U3_TEMP10.10
  Bottom Layer w0.254: v1(37.45,89.945) 37.592,89.804 37.465,89.677 37.592,89.55 v1(37.592,79.121) ; v1(62.431,89.818) 62.484,89.766 v1(62.484,79.121) ; v1@86.853,79.136 v1(86.853,90.199) ; v1(110.617,78.994) v1@110.729,78.994 ; v1@110.729,89.945 v1@110.729,78.994 ; v1(134.986,79.009) v1(134.986,90.326) ; v1(159.497,78.755) v1(159.497,90.453) ; v1(184.267,90.58) 184.267,79.004 v1(184.404,78.867) ; v1(208.735,90.199) 208.735,79.047 v1(208.825,78.957) ; v1(233.246,78.994) v1(233.246,90.199) ; v1(257.683,78.867) 257.757,78.941 v1(257.757,90.199) ; v1@110.729,78.994 110.729,78.882 110.842,78.994 v1@110.729,78.994
CS1: U2.46 U3_TEMP1.9 | length 106.7
  Top Layer w0.254: v1(36.576,89.789) 37.264,89.101 U3_TEMP1.9 ; v1(130.429,75.946) 130.504,75.871 130.504,72.84 U2.46
  Bottom Layer w0.254: v1(36.576,89.789) 36.576,90.17 38.1,91.694 48.26,91.694 63.5,76.454 129.921,76.454 v1(130.429,75.946)
CS2: U2.45 U3_TEMP2.9 | length 83
  Top Layer w0.254: v1(61.595,89.916) 61.722,89.916 61.852,89.786 61.852,89.578 62.245,89.186 U3_TEMP2.9 ; U2.45 131.146,72.84 131.146,76.409 v1(131.191,76.454)
  Bottom Layer w0.254: v1(61.595,89.916) 63.19,91.511 63.785,91.511 63.856,91.44 64.008,91.44 78.359,77.089 130.302,77.089 130.937,76.454 v1(131.191,76.454) v1@131.191,76.2
CS3: U2.44 U3_TEMP3.9 | length 59.5
  Top Layer w0.254: v1(85.979,89.916) 86.667,89.228 U3_TEMP3.9 ; U2.44 131.646,72.84 131.646,73.772 131.77,73.896 131.77,74.293 131.699,74.365 131.699,74.845 131.77,74.916 131.77,77.145 v1(131.699,77.216)
  Bottom Layer w0.254: v1(85.979,89.916) 85.979,90.144 87.6,91.765 88.251,91.765 89.238,90.779 89.321,90.779 89.66,90.439 89.66,90.356 102.292,77.724 130.937,77.724 131.445,77.216 v1(131.699,77.216)
CS4: U2.43 U3_TEMP4.9 | length 36.2
  Top Layer w0.254: v1(109.982,89.916) 110.632,89.266 U3_TEMP4.9 ; U2.43 132.146,72.84 132.146,73.697 132.239,73.79 132.239,74.565 v1(132.278,74.605)
  Bottom Layer w0.254: v1(109.982,89.916) 109.982,90.182 111.692,91.892 117.842,91.892 132.278,77.456 132.278,76.71 132.136,76.567 132.136,74.747 v1(132.278,74.605)
CS5: U2.42 U3_TEMP5.9 | length 20
  Top Layer w0.254: U2.42 132.646,72.84 132.646,73.846 132.858,74.059 132.858,74.857 132.542,75.173 132.542,75.653 132.858,75.968 132.858,76.184 v1(132.715,76.327) ; v1(133.985,89.789) 134.8,88.974 U3_TEMP5.9
  Bottom Layer w0.254: v1(132.715,76.327) 132.715,88.519 v1(133.985,89.789)
CS6: U2.41 U3_TEMP6.9 | length 41
  Top Layer w0.254: U2.41 133.146,72.84 133.146,73.772 133.264,73.89 133.264,75.27 v1(133.121,75.413) ; v1(158.623,90.17) 158.623,90.043 159.311,89.355 U3_TEMP6.9
  Bottom Layer w0.254: v1(133.121,75.413) 133.294,75.586 133.294,76.567 133.121,76.74 133.121,77.597 151.003,77.597 158.623,85.217 v1(158.623,90.17)
CS7: U2.40 U3_TEMP7.9 | length 61.4
  Top Layer w0.254: U2.40 133.646,72.84 133.646,73.697 133.731,73.782 133.731,75.692 133.731,75.787 v1(133.731,76.962) ; v1(183.134,90.17) 184.081,89.223 U3_TEMP7.9
  Bottom Layer w0.254: v1@133.731,76.835 158.397,76.835 171.732,90.17 v1(183.134,90.17)
CS8: U2.39 U3_TEMP8.9 | length 84.8
  Top Layer w0.254: U2.39 134.137,72.831 v1@134.137,76.073 ; v1(207.645,90.043) 208.549,89.139 U3_TEMP8.9
  Bottom Layer w0.254: v1(134.31,76.2) 182.372,76.2 183.261,77.089 183.388,76.962 196.469,90.043 v1(207.645,90.043)
CS9: U2.38 U3_TEMP9.9 | length 108.6
  Top Layer w0.254: U2.38 134.646,72.84 v1@134.646,75.565 ; v1(232.029,90.043) 233.06,89.012 U3_TEMP9.9
  Bottom Layer w0.254: v1(134.747,75.565) 134.818,75.636 205.99,75.636 206.553,76.2 206.655,76.099 208.933,78.377 209.065,78.377 220.731,90.043 v1(232.029,90.043)
CS10: U2.36 U3_TEMP10.9 | length 132.2
  Top Layer w0.254: v1(135.504,75.057) 135.504,72.84 U2.36 U2.36@135.646,72.84 ; v1(256.794,89.916) 257.571,89.139 U3_TEMP10.9
  Bottom Layer w0.254: v1(135.504,75.057) 135.504,75.062 135.667,75.224 230.418,75.224 230.759,75.565 230.886,75.438 245.364,89.916 v1(256.794,89.916)
DGND: C1.2 C2.2 C5.2 C6.2 C7.2 C8.2 C9.2 C10.2 C11.2 C12.2 C13.2 C14.2 C15.2 C16.2 C17.2 C18.2 C19.2 C24_TEMP1.2 C24_TEMP2.2 C24_TEMP3.2 C24_TEMP4.2 C24_TEMP5.2 C24_TEMP6.2 C24_TEMP7.2 C24_TEMP8.2 C24_TEMP9.2 C24_TEMP10.2 FB2.2 P1.1 P2.2 P3.3 R2.1 R3.2 SW1.2 U2.10 U2.27 U2.49 U2.74 U2.99 U3_TEMP1.14 U3_TEMP2.14 U3_TEMP3.14 U3_TEMP4.14 U3_TEMP5.14 U3_TEMP6.14 U3_TEMP7.14 U3_TEMP8.14 U3_TEMP9.14 U3_TEMP10.14 Y1.2 | length 127.6
  Top Layer w0.254: P2.2 31.728,68.602 C2.2 31.728,63.605 40.491,63.605 40.955,64.069 R2.1 42.225,66.294 P1.1 ; U3_TEMP1.14 40.514,86.704 39.43,85.62 C24_TEMP1.2 v1(41.021,85.09) ; U3_TEMP2.14 65.495,86.45 64.411,85.366 C24_TEMP2.2 v1(66.04,84.836) ; U3_TEMP3.14 89.917,86.704 88.833,85.62 C24_TEMP3.2 v1(90.424,85.09) ; U3_TEMP4.14 113.882,86.831 112.798,85.747 C24_TEMP4.2 v1(114.427,85.217) ; v1(125.004,59.599) 125.124,59.719 U2.74 ; P3.3 v1(126.02,54.011) ; v1(128.179,74.585) 128.286,74.585 129.075,73.796 U2.49 ; U3_TEMP5.14 138.05,86.831 136.966,85.747 C24_TEMP5.2 v1(138.684,85.217) ; R3.2 139.99,55.408 v1@140.075,55.323 ; U2.99 v1@140.075,55.323 ; U2.27@140.075,73.531 v1(140.075,74.645) ; v1(140.117,55.281) v1@140.075,55.323 ; U2.10 142.982,63.719 143.304,63.397 143.304,63.041 143.292,63.029 143.292,62.909 143.304,62.897 143.304,62.541 143.292,62.529 143.292,62.409 143.304,62.397 143.304,62.127 v1(144.308,61.123) ; Y1.2 v1(146.882,64.713) ; v1(152.908,57.785) 152.908,59.536 ; v1(152.908,69.342) 152.908,66.829 SW1.2@153.126,66.611 ; U3_TEMP6.14 162.561,86.831 161.477,85.747 C24_TEMP6.2 v1(163.068,85.217) ; U3_TEMP7.14 187.331,87.047 186.247,85.963 C24_TEMP7.2 v1(187.871,85.433) ; U3_TEMP8.14 211.799,86.831 210.715,85.747 C24_TEMP8.2 v1(212.344,85.217) ; U3_TEMP9.14 236.31,86.704 235.226,85.62 C24_TEMP9.2 v1(236.982,85.09) ; U3_TEMP10.14 260.821,86.704 259.737,85.62 C24_TEMP10.2 v1(261.366,85.09)
  Bottom Layer w0.254: FB2.2 29.591,69.088 P2.2 ; C1.2 43.285,66.294 P1.1 ; v1(125.004,59.599) 125.131,59.599 125.882,58.848 C19.2 ; C18.2 127.925,74.331 v1(128.179,74.585) ; 136.931,70.383 C15.2 C16.2 131.978,70.383 C17.2 131.851,68.13 C5.2 131.873,65.833 C6.2 C7.2 131.862,61.664 C8.2 C9.2 136.147,61.653 C10.2 137.058,61.631 C11.2 C12.2 C13.2 C14.2 ; v1@187.833,85.395 v1(187.871,85.433)
MISO: U2.31 U3_TEMP1.11 U3_TEMP2.11 U3_TEMP3.11 U3_TEMP4.11 U3_TEMP5.11 U3_TEMP6.11 U3_TEMP7.11 U3_TEMP8.11 U3_TEMP9.11 U3_TEMP10.11 | length 368.4
  Top Layer w0.254: U3_TEMP1.11 v1(38.564,91.059) ; v1(38.608,80.264) 38.633,80.239 v1(63.627,80.239) 89.812,80.239 ; U3_TEMP2.11 v1(63.545,90.932) ; U3_TEMP3.11 87.967,91.142 v1(88.011,91.186) ; 89.838,80.264 v1(111.887,80.264) v1(136.144,80.264) v1(185.42,80.264) v1(209.931,80.264) v1(234.315,80.264) v1@258.953,80.264 ; U3_TEMP4.11 v1(111.932,91.313) ; U3_TEMP5.11 v1(136.1,90.551) ; U2.31 138.075,73.888 138.014,73.949 138.014,78.197 v1(138.075,78.258) ; U3_TEMP6.11 160.611,91.269 v1(160.655,91.313) ; U3_TEMP7.11 185.381,91.528 v1(185.42,91.567) ; U3_TEMP8.11 v1(209.849,91.313) ; v1(234.315,91.186) 234.36,91.141 U3_TEMP9.11 ; v1(258.826,91.186) 258.871,91.141 U3_TEMP10.11
  Bottom Layer w0.254: v1(38.564,91.059) 38.608,91.015 38.354,90.761 38.608,90.507 v1(38.608,80.264) ; v1(63.545,90.932) 63.5,90.887 63.627,90.76 63.5,90.633 63.627,90.506 v1(63.627,80.239) ; v1@88.011,80.391 88.011,90.932 88.138,91.059 v1(88.011,91.186) ; v1(111.887,80.264) 111.887,91.015 ; v1(111.932,91.313) v1@111.976,91.269 ; v1(136.1,90.551) 136.1,80.308 v1(136.144,80.264) ; v1(138.075,78.258) v1(138.075,80.29) ; v1(160.655,91.313) 160.782,91.186 v1(160.782,80.137) ; v1(185.42,80.264) v1(185.42,91.567) ; v1(209.849,91.313) 209.931,91.231 v1(209.931,80.264) ; v1(234.315,80.264) v1(234.315,91.186) ; v1(258.826,91.186) 258.953,91.059 v1(258.953,80.137)
  other v1: 88.138,80.264
MOSI: U2.32 U3_TEMP1.12 U3_TEMP2.12 U3_TEMP3.12 U3_TEMP4.12 U3_TEMP5.12 U3_TEMP6.12 U3_TEMP7.12 U3_TEMP8.12 U3_TEMP9.12 U3_TEMP10.12 | length 339.7
  Top Layer w0.254: U3_TEMP1.12 39.214,89.482 v1(39.678,89.945) ; v1(39.624,81.534) 39.776,81.382 64.618,81.382 v1(64.643,81.407) v1(89.154,81.407) v1(113.03,81.407) 113.157,81.534 114.023,81.534 114.048,81.509 137.262,81.509 v1(137.287,81.534) v1(161.798,81.534) v1(186.563,81.534) v1(211.074,81.534) v1(235.458,81.534) v1@259.985,81.534 ; U3_TEMP2.12 64.195,89.355 v1(64.659,89.818) ; U3_TEMP3.12 88.617,89.736 v1(89.081,90.199) ; U3_TEMP4.12 112.582,89.736 v1(113.046,90.199) ; U3_TEMP5.12 136.75,89.863 v1(137.214,90.326) ; v1(137.033,78.232) 137.033,74.295 137.575,73.753 U2.32 ; U3_TEMP6.12 161.261,89.76 v1(161.798,90.297) ; U3_TEMP7.12 186.031,90.117 v1(186.495,90.58) ; U3_TEMP8.12 210.499,89.736 v1(210.963,90.199) ; U3_TEMP9.12 235.01,89.736 v1(235.474,90.199) ; U3_TEMP10.12 259.521,89.736 v1(259.985,90.199)
  Bottom Layer w0.254: v1(39.624,81.534) 39.624,89.892 v1(39.678,89.945) ; v1(64.643,81.407) 64.643,89.691 v1@64.77,89.818 ; v1@89.081,81.407 v1(89.081,90.199) ; v1@112.957,81.407 v1@112.957,89.945 ; v1(137.033,78.232) 137.033,81.28 v1(137.287,81.534) 137.214,81.607 v1(137.214,90.326) ; v1(161.798,81.534) v1(161.798,90.297) ; v1(186.495,90.58) 186.495,81.602 v1(186.563,81.534) ; v1@210.963,81.534 v1(210.963,90.199) ; v1(235.458,81.534) 235.474,81.55 v1(235.474,90.199) ; v1(259.985,81.518) v1(259.985,90.199)
NetC18_1: C18.1 U2.48 | length 6.1
  Top Layer w0.254: v1(129.293,75.699) 129.575,75.416 U2.48
  Bottom Layer w0.254: v1(129.293,75.699) 129.293,73.239 C18.1
NetC19_1: C19.1 U2.73 | length 6.2
  Top Layer w0.254: v1(123.998,60.605) 124.09,60.513 125.383,60.513 125.677,60.219 U2.73
  Bottom Layer w0.254: v1(123.998,60.605) 124.042,60.648 C19.1
NetC20_TEMP1_1: C20_TEMP1.1 C21_TEMP1.1 J1_TEMP1.K U3_TEMP1.2 U3_TEMP1.3 | length 17.5
  Top Layer w0.254: U3_TEMP1.3 39.214,94.996 ; 39.214,96.774 39.214,94.996 ; C21_TEMP1.1 39.408,98.864 43.218,102.674 J1_TEMP1.K ; U3_TEMP1.2 39.864,94.773 40.065,94.974 ; C20_TEMP1.1 40.065,94.974 ; 39.214,94.996 39.236,94.974 40.065,94.974
NetC20_TEMP2_1: C20_TEMP2.1 C21_TEMP2.1 J1_TEMP2.K U3_TEMP2.2 U3_TEMP2.3 | length 17.5
  Top Layer w0.254: U3_TEMP2.3 64.195,94.742 ; 64.195,96.52 64.195,94.742 ; C21_TEMP2.1 64.389,98.61 68.199,102.42 J1_TEMP2.K ; U3_TEMP2.2 64.845,94.519 65.046,94.72 ; C20_TEMP2.1 65.046,94.72 ; 64.195,94.742 64.217,94.72 65.046,94.72
NetC20_TEMP3_1: C20_TEMP3.1 C21_TEMP3.1 J1_TEMP3.K U3_TEMP3.2 U3_TEMP3.3 | length 17.5
  Top Layer w0.254: U3_TEMP3.3 88.617,94.996 ; 88.617,96.774 88.617,94.996 ; C21_TEMP3.1 88.811,98.864 92.621,102.674 J1_TEMP3.K ; U3_TEMP3.2 89.267,94.773 89.468,94.974 ; C20_TEMP3.1 89.468,94.974 ; 88.617,94.996 88.639,94.974 89.468,94.974
NetC20_TEMP4_1: C20_TEMP4.1 C21_TEMP4.1 J1_TEMP4.K U3_TEMP4.2 U3_TEMP4.3 | length 17.5
  Top Layer w0.254: U3_TEMP4.3 112.582,95.123 ; 112.582,96.901 112.582,95.123 ; C21_TEMP4.1 112.776,98.991 116.586,102.801 J1_TEMP4.K ; U3_TEMP4.2 113.232,94.9 113.433,95.101 ; C20_TEMP4.1 113.433,95.101 ; 112.582,95.123 112.604,95.101 113.433,95.101
NetC20_TEMP5_1: C20_TEMP5.1 C21_TEMP5.1 J1_TEMP5.K U3_TEMP5.2 U3_TEMP5.3 | length 17.5
  Top Layer w0.254: U3_TEMP5.3 136.75,95.123 ; 136.75,96.901 136.75,95.123 ; C21_TEMP5.1 136.944,98.991 140.754,102.801 J1_TEMP5.K ; U3_TEMP5.2 137.4,94.9 137.601,95.101 ; C20_TEMP5.1 137.601,95.101 ; 136.75,95.123 136.772,95.101 137.601,95.101
NetC20_TEMP6_1: C20_TEMP6.1 C21_TEMP6.1 J1_TEMP6.K U3_TEMP6.2 U3_TEMP6.3 | length 17.5
  Top Layer w0.254: U3_TEMP6.3 161.261,95.123 ; 161.261,96.901 161.261,95.123 ; C21_TEMP6.1 161.455,98.991 165.265,102.801 J1_TEMP6.K ; U3_TEMP6.2 161.911,94.9 162.112,95.101 ; C20_TEMP6.1 162.112,95.101 ; 161.261,95.123 161.283,95.101 162.112,95.101
NetC20_TEMP7_1: C20_TEMP7.1 C21_TEMP7.1 J1_TEMP7.K U3_TEMP7.2 U3_TEMP7.3 | length 17.5
  Top Layer w0.254: U3_TEMP7.3 186.031,95.339 ; 186.031,97.117 186.031,95.339 ; C21_TEMP7.1 186.225,99.207 190.035,103.017 J1_TEMP7.K ; U3_TEMP7.2 186.681,95.116 186.882,95.317 ; C20_TEMP7.1 186.882,95.317 ; 186.031,95.339 186.053,95.317 186.882,95.317
NetC20_TEMP8_1: C20_TEMP8.1 C21_TEMP8.1 J1_TEMP8.K U3_TEMP8.2 U3_TEMP8.3 | length 17.5
  Top Layer w0.254: U3_TEMP8.3 210.499,95.123 ; 210.499,96.901 210.499,95.123 ; C21_TEMP8.1 210.693,98.991 214.503,102.801 J1_TEMP8.K ; U3_TEMP8.2 211.149,94.9 211.35,95.101 ; C20_TEMP8.1 211.35,95.101 ; 210.499,95.123 210.521,95.101 211.35,95.101
NetC20_TEMP9_1: C20_TEMP9.1 C21_TEMP9.1 J1_TEMP9.K U3_TEMP9.2 U3_TEMP9.3 | length 17.5
  Top Layer w0.254: U3_TEMP9.3 235.01,94.996 ; 235.01,96.774 235.01,94.996 ; C21_TEMP9.1 235.204,98.864 239.014,102.674 J1_TEMP9.K ; U3_TEMP9.2 235.66,94.773 235.861,94.974 ; C20_TEMP9.1 235.861,94.974 ; 235.01,94.996 235.032,94.974 235.861,94.974
NetC20_TEMP10_1: C20_TEMP10.1 C21_TEMP10.1 J1_TEMP10.K U3_TEMP10.2 U3_TEMP10.3 | length 17.5
  Top Layer w0.254: U3_TEMP10.3 259.521,94.996 ; 259.521,96.774 259.521,94.996 ; C21_TEMP10.1 259.715,98.864 263.525,102.674 J1_TEMP10.K ; U3_TEMP10.2 260.171,94.773 260.372,94.974 ; C20_TEMP10.1 260.372,94.974 ; 259.521,94.996 259.543,94.974 260.372,94.974
NetC21_TEMP1_2: C21_TEMP1.2 C22_TEMP1.1 J1_TEMP1.+ U3_TEMP1.4 | length 15.6
  Top Layer w0.254: 29.687,103.596 C22_TEMP1.1 37.078,98.066 C21_TEMP1.2 37.608,96.288 38.564,95.332 U3_TEMP1.4
NetC21_TEMP2_2: C21_TEMP2.2 C22_TEMP2.1 J1_TEMP2.+ U3_TEMP2.4 | length 15.6
  Top Layer w0.254: 54.668,103.342 C22_TEMP2.1 62.059,97.812 C21_TEMP2.2 62.589,96.034 63.545,95.078 U3_TEMP2.4
NetC21_TEMP3_2: C21_TEMP3.2 C22_TEMP3.1 J1_TEMP3.+ U3_TEMP3.4 | length 15.6
  Top Layer w0.254: 79.09,103.596 C22_TEMP3.1 86.481,98.066 C21_TEMP3.2 87.011,96.288 87.967,95.332 U3_TEMP3.4
NetC21_TEMP4_2: C21_TEMP4.2 C22_TEMP4.1 J1_TEMP4.+ U3_TEMP4.4 | length 15.6
  Top Layer w0.254: 103.055,103.723 C22_TEMP4.1 110.446,98.193 C21_TEMP4.2 110.976,96.415 111.932,95.459 U3_TEMP4.4
NetC21_TEMP5_2: C21_TEMP5.2 C22_TEMP5.1 J1_TEMP5.+ U3_TEMP5.4 | length 15.6
  Top Layer w0.254: 127.223,103.723 C22_TEMP5.1 134.614,98.193 C21_TEMP5.2 135.144,96.415 136.1,95.459 U3_TEMP5.4
NetC21_TEMP6_2: C21_TEMP6.2 C22_TEMP6.1 J1_TEMP6.+ U3_TEMP6.4 | length 15.6
  Top Layer w0.254: 151.734,103.723 C22_TEMP6.1 159.125,98.193 C21_TEMP6.2 159.655,96.415 160.611,95.459 U3_TEMP6.4
NetC21_TEMP7_2: C21_TEMP7.2 C22_TEMP7.1 J1_TEMP7.+ U3_TEMP7.4 | length 15.6
  Top Layer w0.254: 176.504,103.939 C22_TEMP7.1 183.895,98.409 C21_TEMP7.2 184.425,96.631 185.381,95.675 U3_TEMP7.4
NetC21_TEMP8_2: C21_TEMP8.2 C22_TEMP8.1 J1_TEMP8.+ U3_TEMP8.4 | length 15.6
  Top Layer w0.254: 200.972,103.723 C22_TEMP8.1 208.363,98.193 C21_TEMP8.2 208.893,96.415 209.849,95.459 U3_TEMP8.4
NetC21_TEMP9_2: C21_TEMP9.2 C22_TEMP9.1 J1_TEMP9.+ U3_TEMP9.4 | length 15.6
  Top Layer w0.254: 225.483,103.596 C22_TEMP9.1 232.874,98.066 C21_TEMP9.2 233.404,96.288 234.36,95.332 U3_TEMP9.4
NetC21_TEMP10_2: C21_TEMP10.2 C22_TEMP10.1 J1_TEMP10.+ U3_TEMP10.4 | length 15.6
  Top Layer w0.254: 249.994,103.596 C22_TEMP10.1 257.385,98.066 C21_TEMP10.2 257.915,96.288 258.871,95.332 U3_TEMP10.4
NetR1_1: R1.1 R2.2 U1.1 | length 6.6
  Top Layer w0.254: U1.1@36.201,67.878 U1.1 37.272,67.559 R1.1 R2.2
NetR3_1: R3.1 U2.94 | length 2.8
  Top Layer w0.254: R3.1 136.373,55.601 137.575,56.803 U2.94
NetR4_1: R4.1 SW1.1 U2.14 | length 12.3
  Top Layer w0.254: U2.14 143.189,65.719 145.006,67.536 148.408,67.536 148.408,66.829 SW1.1@148.626,66.611 ; v1(148.245,57.567) 148.245,59.373 148.408,59.536
  Bottom Layer w0.254: 146.02,57.567 v1(148.245,57.567)
NetU2_12: U2.12 Y1.3 | length 3.9
  Top Layer w0.254: U2.12 143.361,64.719 143.44,64.798 143.92,64.798 144.259,64.459 144.259,64.402 145.148,63.513 Y1.3
NetU2_13: U2.13 Y1.1 | length 3.6
  Top Layer w0.254: U2.13 143.324,65.219 144.018,65.913 Y1.1
SWCLK: P3.2 U2.76 | length 5.6
  Top Layer w0.254: P3.2 128.56,57.654 U2.76
SWDIO: P3.4 U2.72 | length 13.8
  Top Layer w0.254: P3.4 123.48,59.599 122.972,60.107 122.972,60.996 123.607,61.631 124.877,61.631 125.789,60.719 U2.72
VIN_12: C1.1 P1.2 U1.3 | length 6.5
  Top Layer w0.254: U1.3@40.811,68.58 U1.3 40.965,68.834 P1.2
  Bottom Layer w0.254: C1.1 43.307,68.834 P1.2
pads on no net: J1_TEMP1.G J1_TEMP2.G J1_TEMP3.G J1_TEMP4.G J1_TEMP5.G J1_TEMP6.G J1_TEMP7.G J1_TEMP8.G J1_TEMP9.G J1_TEMP10.G U2.1 U2.2 U2.3 U2.4 U2.5 U2.7 U2.8 U2.9 U2.15 U2.16 U2.17 U2.18 U2.23 U2.24 U2.25 U2.26 U2.29 U2.30 U2.33 U2.34 U2.35 U2.37 U2.47 U2.51 U2.52 U2.53 U2.54 U2.55 U2.56 U2.57 U2.58 U2.59 U2.60 U2.61 U2.62 U2.63 U2.64 U2.65 U2.66 U2.67 U2.68 U2.69 U2.70 U2.71 U2.77 U2.78 U2.79 U2.80 U2.81 U2.82 U2.83 U2.84 U2.85 U2.86 U2.87 U2.88 U2.90 U2.91 U2.92 U2.93 U2.95 U2.96 U2.97 U2.98 U3_TEMP1.6 U3_TEMP1.7 U3_TEMP1.13 U3_TEMP2.6 U3_TEMP2.7 U3_TEMP2.13 U3_TEMP3.6 U3_TEMP3.7 U3_TEMP3.13 U3_TEMP4.6 U3_TEMP4.7 U3_TEMP4.13 U3_TEMP5.6 U3_TEMP5.7 U3_TEMP5.13 U3_TEMP6.6 U3_TEMP6.7 U3_TEMP6.13 U3_TEMP7.6 U3_TEMP7.7 U3_TEMP7.13 U3_TEMP8.6 U3_TEMP8.7 U3_TEMP8.13 U3_TEMP9.6 U3_TEMP9.7 U3_TEMP9.13 U3_TEMP10.6 U3_TEMP10.7 U3_TEMP10.13

## Polygon pours and split planes (outlines as drawn)
DGND on Bottom Layer "Bottom Layer-DGND" (solid, pour order 6): 24.511,85.217 24.511,53.213 263.271,53.213 263.271,85.725